# Altium PCB 10515.0502_CVSP1_2020（2拼版）2020.1019.PcbDoc (part 3 of 3)
Units mm, origin at the board's own origin, x right, y up, seen from the top; angles counter-clockwise.
Board outline 162.18 x 163.99 mm, 2 copper layers (Top Layer, Bottom Layer); 124 components, 0 nets, 386 pads, 70 vias.
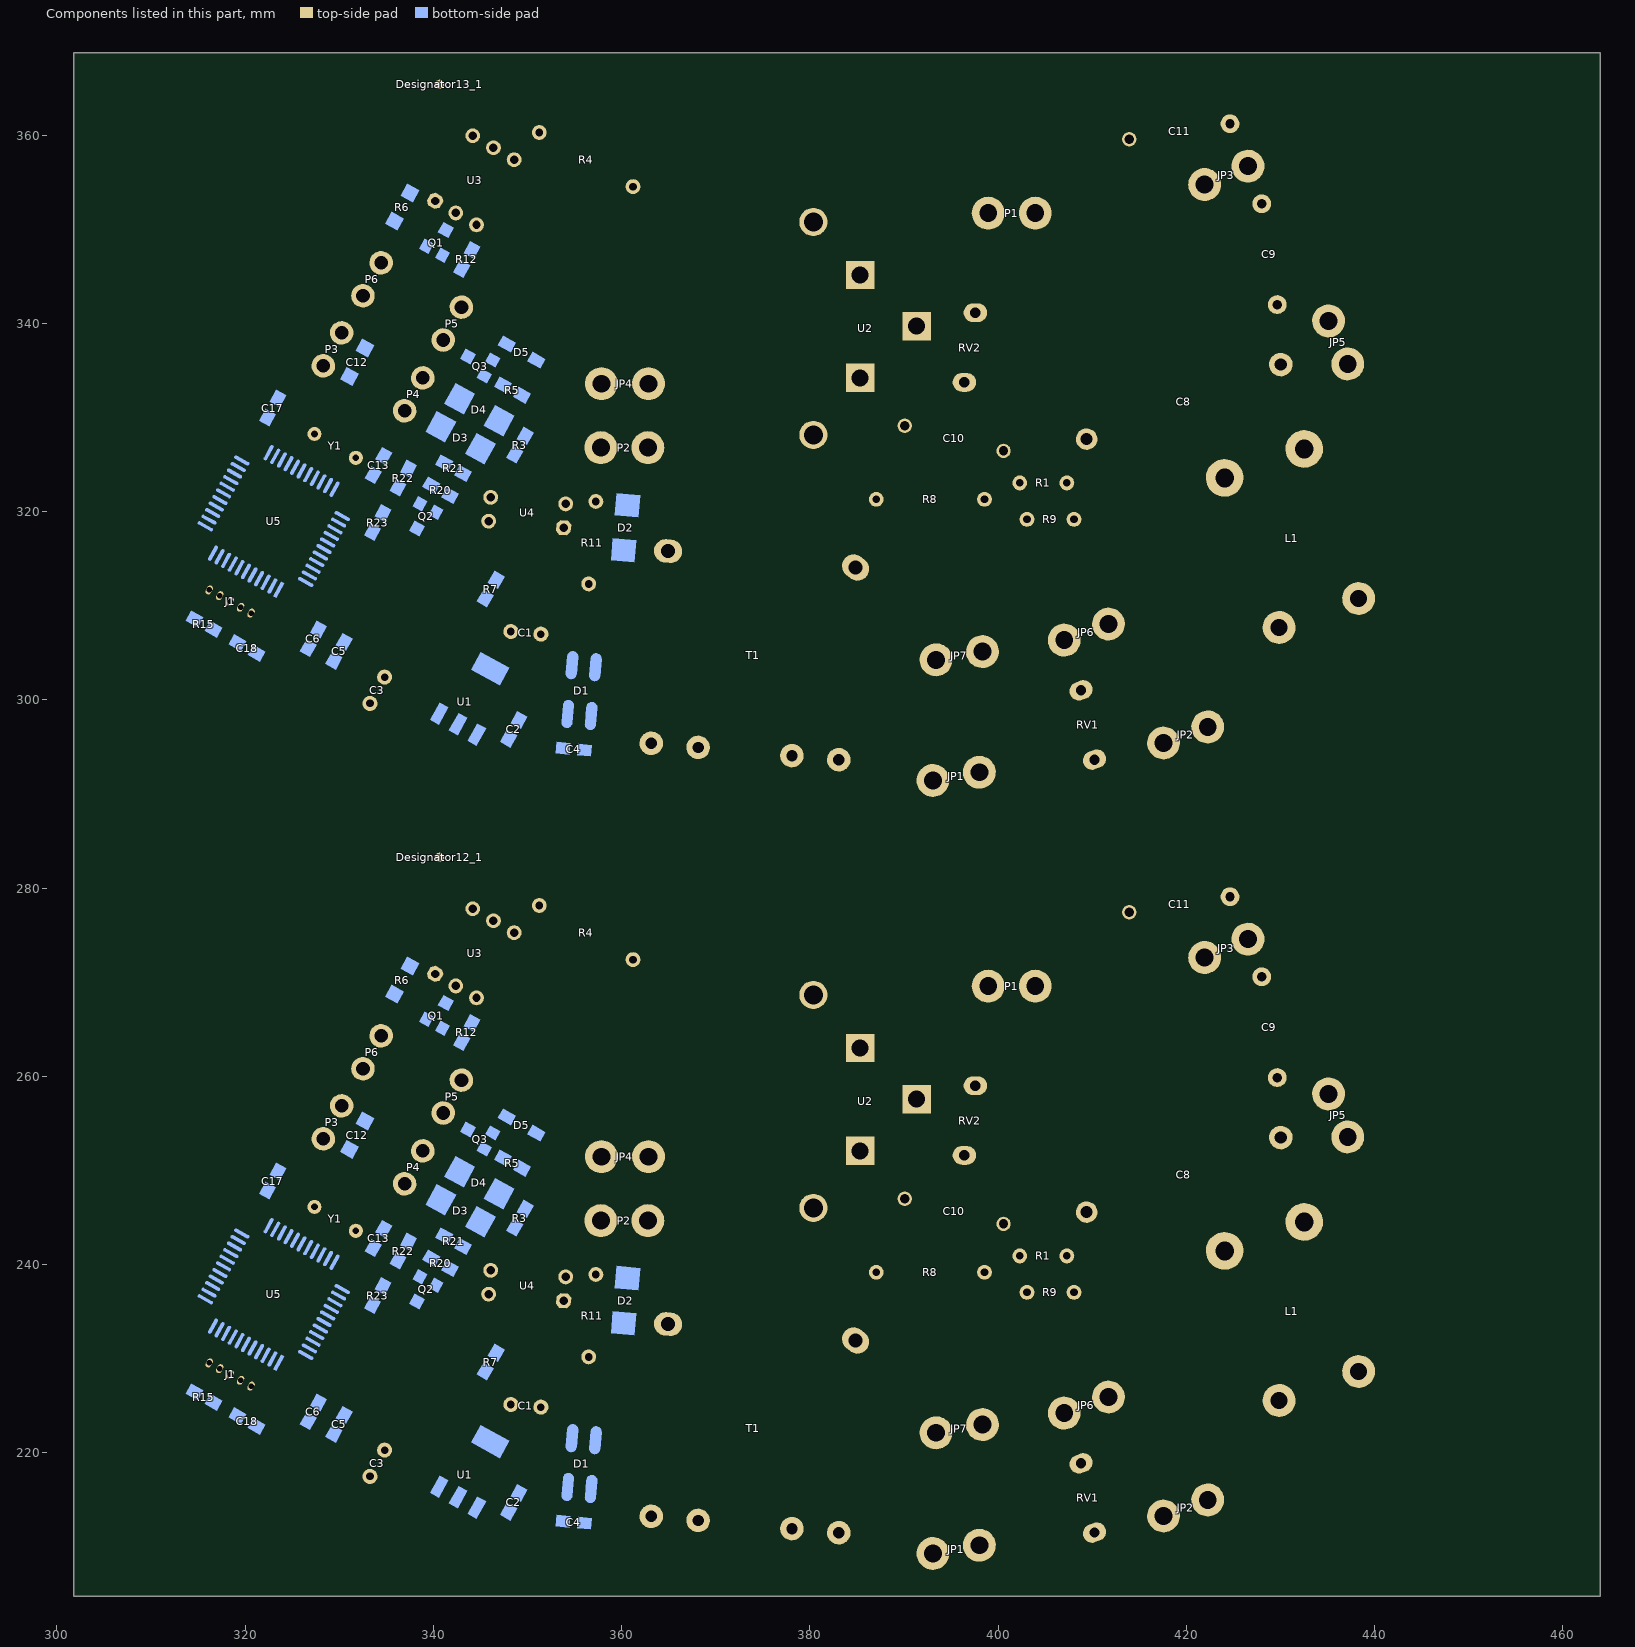
[diagram p3: the components of this part, seen from the top]

## Via types
v1: diameter 0.7, hole 0.4, Top Layer to Bottom Layer, tented both sides, 46 vias
v2: diameter 0.8, hole 0.4, Top Layer to Bottom Layer, tented both sides, 24 vias

## Nets (pads, with @x,y where several pads share a name; then routed paths per layer and width w, separated by ;. In a path a pad name is that pad's centre, name@x,y a point inside that pad or via, vN(x,y) a via of type N, cw(c..) or ccw(c..) an arc to the next point about the centre after c; other vN are vias at no path point) (continued)
copper on no net: (continued)
  Bottom Layer w0.6: 330.988,256.439 330.997,256.442 ; 330.988,338.569 330.997,338.572 ; 340.069,215.43 ccw(c339.54,215.723) 340.121,215.89 ; 340.069,297.56 ccw(c339.54,297.853) 340.121,298.02 ; 340.07,215.432 cw(c340.597,215.14) 340.431,215.719 ; 340.07,297.562 cw(c340.597,297.27) 340.431,297.849 ; 340.616,216.418 339.242,213.934 339.941,212.731 347.989,210.108 348.894,210.06 349.275,210.632 350.863,213.616 350.545,214.632 349.113,215.743 350.99,219.395 351.434,224.856 354.419,224.538 354.863,224.094 354.837,223.595 ; 340.616,298.548 339.242,296.064 339.941,294.861 347.989,292.238 348.894,292.191 349.275,292.762 350.863,295.747 350.545,296.763 349.113,297.873 350.99,301.525 351.434,306.986 354.419,306.669 354.863,306.224 354.837,305.725 ; 349.072,216.173 ccw(c348.829,216.93) 349.536,216.567 ; 349.072,298.303 ccw(c348.829,299.06) 349.536,298.697 ; 349.094,215.299 cw(c349.249,214.072) 350.007,215.05 ; 349.094,297.429 cw(c349.249,296.202) 350.007,297.18 ; 349.494,215.956 cw(c350.277,216.208) 349.545,216.584 ; 349.494,298.086 cw(c350.277,298.338) 349.545,298.714 ; 351.053,224.532 cw(c350.133,223.751) 351.336,223.653 cw(c352.539,223.555) 351.758,224.475 ; 351.053,306.662 cw(c350.133,305.881) 351.336,305.783 cw(c352.539,305.685) 351.758,306.605 ; 351.748,224.467 cw(c352.507,223.528) 352.634,224.728 cw(c352.762,225.929) 351.823,225.17 ; 351.748,306.597 cw(c352.507,305.658) 352.634,306.858 cw(c352.762,308.059) 351.823,307.3 ; 353.454,235.871 cw(c352.505,235.175) 353.668,234.996 cw(c354.831,234.817) 354.135,235.766 ; 353.454,318.001 cw(c352.505,317.305) 353.668,317.126 cw(c354.831,316.947) 354.135,317.896 ; 353.53,212.509 cw(c352.917,211.981) 353.723,211.921 cw(c354.53,211.861) 354.002,212.474 ; 353.53,294.639 cw(c352.917,294.111) 353.723,294.051 cw(c354.53,293.991) 354.002,294.604 ; 353.847,236.159 353.593,234.508 354.165,234.127 354.99,234.063 357.874,233.79 360.223,233.79 360.223,231.296 359.114,230.186 356.509,230.186 ; 353.847,318.289 353.593,316.638 354.165,316.257 354.99,316.194 357.874,315.92 360.223,315.92 360.223,313.426 359.114,312.316 356.509,312.316 ; 353.934,213.838 ccw(c355.165,213.672) 354.177,212.919 ; 353.934,295.968 ccw(c355.165,295.802) 354.177,295.049 ; 353.96,215.296 cw(c353.5,214.945) 354.073,214.868 ; 353.96,297.426 cw(c353.5,297.075) 354.073,296.998 ; 354.046,214.664 cw(c354.908,214.547) 354.381,215.239 ; 354.046,296.794 cw(c354.908,296.677) 354.381,297.369 ; 354.278,216.374 353.784,212.727 353.593,210.187 353.593,209.489 354.419,208.854 366.166,207.203 367.436,207.711 367.518,208.31 ; 354.278,298.504 353.784,294.857 353.593,292.318 353.593,291.619 354.419,290.984 366.166,289.333 367.436,289.841 367.518,290.44 ; 354.608,222.674 ccw(c354.196,223.132) 354.811,223.1 ; 354.608,304.804 ccw(c354.196,305.262) 354.811,305.23 ; 354.611,222.677 ccw(c354.179,223.169) 354.833,223.127 ; 354.611,304.807 ccw(c354.179,305.299) 354.833,305.257 ; 354.8,223.649 354.798,223.609 ; 354.8,305.78 354.798,305.739 ; 354.819,223.252 ccw(c355.651,223.209) 355.032,222.652 ; 354.819,305.382 ccw(c355.651,305.339) 355.032,304.782 ; 354.839,223.223 ccw(c355.63,223.172) 355.035,222.649 ; 354.839,305.353 ccw(c355.63,305.302) 355.035,304.779 ; 355.801,212.317 cw(c355.174,211.806) 355.979,211.724 cw(c356.783,211.642) 356.272,212.269 ; 355.801,294.447 cw(c355.174,293.936) 355.979,293.854 cw(c356.783,293.772) 356.272,294.399 ; 356.276,213.634 ccw(c357.493,213.397) 356.465,212.704 ; 356.276,295.764 ccw(c357.493,295.527) 356.465,294.834 ; 356.415,214.343 cw(c357.442,214.143) 356.857,215.011 ; 356.415,296.473 cw(c357.442,296.273) 356.857,297.141 ; 356.768,216.156 356.061,212.528 355.816,210.124 356.256,209.923 356.416,209.85 361.658,209.169 362.483,209.679 362.675,210.695 ; 356.768,298.286 356.061,294.658 355.816,292.254 356.256,292.053 356.416,291.98 361.658,291.299 362.483,291.81 362.675,292.825 ; 356.854,229.842 cw(c357.686,229.01) 357.686,230.186 cw(c357.686,231.363) 356.854,230.531 ; 356.854,311.972 cw(c357.686,311.14) 357.686,312.316 cw(c357.686,313.493) 356.854,312.661 ; 357.966,233.79 ccw(c357.966,235.984) 359.517,234.433 ; 357.966,315.92 ccw(c357.966,318.114) 359.517,316.563 ; 357.995,233.79 cw(c357.995,231.638) 359.517,233.16 ; 357.995,315.92 cw(c357.995,313.768) 359.517,315.29 ; 359.657,233.148 cw(c358.288,231.78) 360.223,231.78 ; 359.657,315.278 cw(c358.288,313.91) 360.223,313.91 ; 360.223,231.443 cw(c362.634,231.443) 360.929,233.148 ; 360.223,313.573 cw(c362.634,313.573) 360.929,315.278 ; 362.373,212.719 cw(c360.479,211.426) 362.732,211.001 cw(c364.986,210.575) 363.693,212.47 ; 362.373,294.849 cw(c360.479,293.556) 362.732,293.131 cw(c364.986,292.705) 363.693,294.6 ; 362.386,212.701 cw(c360.523,211.364) 362.786,210.991 cw(c365.049,210.619) 363.712,212.483 ; 362.386,294.831 cw(c360.523,293.494) 362.786,293.121 cw(c365.049,292.749) 363.712,294.613 ; v1(366.353,238.196) 367.31,239.153 387.063,239.153 ; v1(366.353,320.326) 367.31,321.283 387.063,321.283 ; 367.382,212.245 cw(c365.554,210.859) 367.826,210.547 cw(c370.098,210.234) 368.713,212.062 ; 367.382,294.375 cw(c365.554,292.989) 367.826,292.677 cw(c370.098,292.364) 368.713,294.192 ; 367.436,208.155 367.518,208.31 ; 367.436,290.286 367.518,290.44 ; 368.139,212.819 367.518,208.31 ; 368.139,294.949 367.518,290.44 ; 386.201,239.153 ccw(c386.201,240.415) 387.093,239.523 ; 386.201,321.283 ccw(c386.201,322.545) 387.093,321.653 ; 386.322,239.153 cw(c386.322,238.062) 387.093,238.833 ; 386.322,321.283 cw(c386.322,320.192) 387.093,320.963 ; 354.731,221.555 354.863,223.586 354.837,223.595 ; 354.731,221.555 354.798,223.609 ; 354.731,221.555 354.837,223.595 ; 354.731,303.685 354.863,305.716 354.837,305.725 ; 354.731,303.685 354.798,305.739 ; 354.731,303.685 354.837,305.725 ; 354.798,223.609 354.837,223.595 ; 354.798,305.739 354.837,305.725 ; 362.675,210.695 363.158,213.254 362.737,210.695 362.675,210.695 ; 362.675,292.825 363.158,295.384 362.737,292.826 362.675,292.825
  Bottom Layer w0.8: 330.259,256.86 332.463,254.728 338.888,252.078 ; 330.259,338.99 332.463,336.858 338.888,334.208 ; 330.273,256.01 cw(c330.307,253.958) 331.734,255.433 cw(c333.161,256.908) 331.109,256.874 ; 330.273,338.14 cw(c330.307,336.088) 331.734,337.563 cw(c333.161,339.038) 331.109,339.004 ; 331.293,252.383 cw(c331.293,251.398) 331.989,252.094 ; 331.293,334.513 cw(c331.293,333.528) 331.989,334.224 ; 331.355,252.729 335.129,248.955 336.249,248.955 ; 331.355,334.859 335.129,331.085 336.249,331.085 ; 331.819,255.351 ccw(c332.504,256.06) 332.521,255.074 ; 331.819,337.481 ccw(c332.504,338.19) 332.521,337.204 ; 332.524,260.805 341.255,255.939 ; 332.524,342.935 341.255,338.069 ; 332.742,254.929 ccw(c333.663,255.313) 333.283,254.39 ; 332.742,337.059 ccw(c333.663,337.443) 333.283,336.52 ; 333.647,254.24 v1(334.438,255.803) ; 333.647,336.37 v1(334.438,337.933) ; 334.463,264.303 339.063,266.268 ; 334.463,346.433 339.063,348.398 ; 334.78,265.092 ccw(c335.544,266.996) 336.35,265.109 ccw(c337.156,263.222) 335.252,263.986 ; 334.78,347.222 ccw(c335.544,349.126) 336.35,347.239 ccw(c337.156,345.352) 335.252,346.116 ; 334.928,237.896 ccw(c335.865,238.245) 335.449,237.336 ; 334.928,320.026 ccw(c335.865,320.375) 335.449,319.466 ; 336.255,240.429 334.646,237.702 338.251,236.057 ; 336.255,322.559 334.646,319.832 338.251,318.187 ; 336.949,248.58 340.815,246.88 342.79,249.855 ; 336.949,330.71 340.815,329.01 342.79,331.985 ; 337.363,242.428 v1(338.163,243.703) ; 337.363,324.558 v1(338.163,325.833) ; 337.526,271.727 338.375,270.878 340.188,270.878 ; 337.526,353.857 338.375,353.008 340.188,353.008 ; 338.018,265.821 cw(c338.618,264.415) 339.188,265.834 ; 338.018,347.951 cw(c338.618,346.545) 339.188,347.964 ; 338.103,251.752 ccw(c336.208,250.963) 336.991,252.86 ccw(c337.773,254.758) 338.562,252.863 ; 338.103,333.882 ccw(c336.208,333.093) 336.991,334.99 ccw(c337.773,336.888) 338.562,334.993 ; 338.588,238.728 339.788,240.678 341.164,243.036 ; 338.588,320.858 339.788,322.808 341.164,325.166 ; 339.327,239.929 ccw(c338.475,240.453) 339.448,240.685 ; 339.327,322.059 ccw(c338.475,322.583) 339.448,322.815 ; 339.914,270.604 ccw(c339.253,269.943) 339.253,270.878 ccw(c339.253,271.813) 339.914,271.152 ; 339.914,352.734 ccw(c339.253,352.073) 339.253,353.008 ccw(c339.253,353.943) 339.914,353.282 ; v1(340.313,235.628) 340.294,235.647 340.294,237.783 341.787,239.57 ; v1(340.313,317.758) 340.294,317.777 340.294,319.913 341.787,321.7 ; 340.69,247.725 ccw(c340.304,249.637) 341.929,248.559 ; 340.69,329.855 ccw(c340.304,331.767) 341.929,330.689 ; 340.988,265.103 344.121,265.677 ; 340.988,347.233 344.121,347.807 ; 341.215,238.885 ccw(c340.453,239.522) 341.442,239.61 ; 341.215,321.015 ccw(c340.453,321.652) 341.442,321.74 ; 341.325,267.774 342.388,269.608 ; 341.325,349.904 342.388,351.738 ; 341.633,247.1 cw(c343.507,247.478) 341.914,248.536 ; 341.633,329.23 cw(c343.507,329.608) 341.914,330.666 ; 341.676,248.177 cw(c343.301,247.098) 342.914,249.01 ; 341.676,330.307 cw(c343.301,329.228) 342.914,331.14 ; 341.691,248.199 ccw(c340.097,249.257) 341.972,249.635 ; 341.691,330.329 ccw(c340.097,331.387) 341.972,331.765 ; 342.013,269.508 cw(c341.11,269.268) 341.919,268.799 cw(c342.728,268.33) 342.487,269.234 ; 342.013,351.638 cw(c341.11,351.398) 341.919,350.929 cw(c342.728,350.46) 342.487,351.364 ; 342.988,259.603 343.667,258.924 343.667,254.34 ; 342.988,341.733 343.667,341.054 343.667,336.47 ; 343.163,241.928 345.013,244.553 ; 343.163,324.058 345.013,326.683 ; 343.251,265.518 cw(c343.414,264.63) 343.926,265.373 ; 343.251,347.648 cw(c343.414,346.76) 343.926,347.503 ; 343.506,241.907 cw(c344.489,242.077) 343.673,242.652 ; 343.506,324.037 cw(c344.489,324.207) 343.673,324.782 ; 343.85,242.903 cw(c345.45,241.775) 345.116,243.704 ; 343.85,325.033 cw(c345.45,323.905) 345.116,325.834 ; 343.871,242.932 ccw(c342.313,244.03) 344.191,244.355 ; 343.871,325.062 ccw(c342.313,326.16) 344.191,326.485 ; 345.393,252.297 346.354,251.336 347.414,251.336 ; 345.393,334.427 346.354,333.466 347.414,333.466 ; 346.338,254.003 347.814,255.479 347.814,255.701 ; 346.338,336.133 347.814,337.609 347.814,337.831 ; 346.988,247.528 349.883,246.048 ; 346.988,329.658 349.883,328.178 ; 348.587,275.266 355.943,270.893 364.791,264.874 ; 348.587,357.396 355.943,353.024 364.791,347.004 ; 348.683,274.891 cw(c348.913,273.984) 349.391,274.788 cw(c349.869,275.592) 348.963,275.362 ; 348.683,357.021 cw(c348.913,356.114) 349.391,356.918 cw(c349.869,357.722) 348.963,357.492 ; 348.888,243.695 ccw(c348.655,243.695) 348.655,243.929 349.205,243.378 v1(349.913,243.378) cw(c349.913,244.39) 348.942,244.106 ; 348.888,325.825 ccw(c348.655,325.825) 348.655,326.059 349.205,325.508 v1(349.913,325.508) cw(c349.913,326.52) 348.942,326.236 ; 348.984,246.508 cw(c348.474,245.511) 349.539,245.856 ; 348.984,328.638 cw(c348.474,327.641) 349.539,327.986 ; 349.009,243.575 ccw(c349.679,244.245) v1@349.926,243.33 ; 349.009,325.705 ccw(c349.679,326.375) v1@349.926,325.46 ; 349.413,250.228 349.413,250.953 v1(350.013,251.553) ; 349.413,332.358 349.413,333.083 v1(350.013,333.683) ; 364.256,265.17 364.791,264.874 ; 364.256,347.3 364.791,347.004 ; 383.215,265.026 cw(c381.41,262.818) 384.258,262.965 ; 383.215,347.156 cw(c381.41,344.948) 384.258,345.095 ; 383.793,264.554 ccw(c385.048,266.09) 385.247,264.116 ; 383.793,346.684 ccw(c385.048,348.22) 385.247,346.246 ; 384.639,251.25 cw(c383.29,249.684) 385.357,249.684 ; 384.639,333.38 cw(c383.29,331.814) 385.357,331.814 ; 385.357,252.083 385.357,249.684 ; 385.357,263.275 383.401,264.874 364.791,264.874 ; 385.357,334.213 385.357,331.814 ; 385.357,345.405 383.401,347.004 364.791,347.004 ; 386.075,251.25 ccw(c387.424,249.684) 385.357,249.684 ; 386.075,333.38 ccw(c387.424,331.814) 385.357,331.814 ; 389.83,247.283 ccw(c389.212,246.665) 389.212,247.538 ccw(c389.212,248.412) 389.83,247.794 ; 389.83,329.413 ccw(c389.212,328.795) 389.212,329.668 ccw(c389.212,330.542) 389.83,329.924 ; 390.086,247.9 ccw(c390.086,250.368) 391.831,248.623 ; 390.086,330.03 ccw(c390.086,332.498) 391.831,330.753 ; 391.357,257.571 394.545,257.571 398.093,261.119 ; 391.357,339.701 394.545,339.701 398.093,343.249 ; 392.134,210.264 ccw(c389.83,212.569) 393.089,212.569 ccw(c396.348,212.569) 394.044,210.264 ; 392.134,292.394 ccw(c389.83,294.699) 393.089,294.699 ccw(c396.348,294.699) 394.044,292.394 ; 392.135,256.794 cw(c394.013,254.916) 394.013,257.571 cw(c394.013,260.227) 392.135,258.349 ; 392.135,338.924 cw(c394.013,337.046) 394.013,339.701 cw(c394.013,342.357) 392.135,340.479 ; 392.464,221.171 cw(c390.955,219.663) 393.089,219.663 ; 392.464,303.301 cw(c390.955,301.793) 393.089,301.793 ; 393.089,218.071 cw(c397.474,218.071) 394.373,221.171 ; 393.089,220.002 cw(c395.542,220.002) 393.807,221.737 ; 393.089,300.201 cw(c397.474,300.201) 394.373,303.301 ; 393.089,302.132 cw(c395.542,302.132) 393.807,303.867 ; 393.419,222.126 ccw(c393.419,227.35) 397.331,223.889 ; 393.419,304.256 ccw(c393.419,309.48) 397.331,306.019 ; 394.099,208.414 cw(c396.093,206.644) 396.093,209.31 ; 394.099,210.206 ccw(c396.093,211.976) 396.093,209.31 ; 394.099,290.544 cw(c396.093,288.774) 396.093,291.44 ; 394.099,292.336 ccw(c396.093,294.106) 396.093,291.44 ; 394.428,221.23 cw(c396.422,219.46) 396.422,222.126 cw(c396.422,224.792) 394.428,223.022 ; 394.428,303.36 cw(c396.422,301.59) 396.422,304.256 cw(c396.422,306.922) 394.428,305.152 ; 394.525,251.317 cw(c396.18,249.663) 396.18,252.002 ; 394.525,333.447 cw(c396.18,331.793) 396.18,334.132 ; 394.865,209.31 ccw(c394.865,212.963) 397.601,210.542 ; 394.865,291.44 ccw(c394.865,295.093) 397.601,292.672 ; 395.195,222.126 ccw(c395.195,225.779) 397.931,223.359 ; 395.195,304.256 ccw(c395.195,307.909) 397.931,305.489 ; 395.692,258.718 cw(c397.347,257.064) 397.347,259.403 ; 395.692,340.848 cw(c397.347,339.194) 397.347,341.533 ; 396.463,251.978 395.805,251.978 395.455,251.628 394.836,251.628 390.746,247.538 388.473,247.538 387.988,247.053 385.357,249.684 ; 396.463,334.108 395.805,334.108 395.455,333.758 394.836,333.758 390.746,329.668 388.473,329.668 387.988,329.183 385.357,331.814 ; 397.002,211.072 cw(c393.089,214.533) 393.089,209.31 ; 397.002,293.202 cw(c393.089,296.663) 393.089,291.44 ; 397.422,260.428 ccw(c395.803,262.047) 398.093,262.047 ; 397.422,342.558 ccw(c395.803,344.177) 398.093,344.177 ; 397.685,260.581 ccw(c397.535,261.119) 398.093,261.119 ; 397.685,342.711 ccw(c397.535,343.249) 398.093,343.249 ; 398.013,210.178 397.889,210.054 cw(c396.093,211.85) 396.093,209.31 ; 398.013,292.308 397.889,292.184 cw(c396.093,293.98) 396.093,291.44 ; 398.093,264.24 cw(c404.303,264.24) 399.912,268.631 ; 398.093,266.171 cw(c402.372,266.171) 399.346,269.196 ; 398.093,346.37 cw(c404.303,346.37) 399.912,350.761 ; 398.093,348.301 cw(c402.372,348.301) 399.346,351.326 ; 398.343,222.994 398.218,222.87 cw(c396.422,224.666) 396.422,222.126 395.313,222.126 393.419,222.126 ccw(c394.214,221.33) 393.089,221.33 393.089,209.31 ; 398.343,305.124 398.218,305 cw(c396.422,306.796) 396.422,304.256 395.313,304.256 393.419,304.256 ccw(c394.214,303.46) 393.089,303.46 393.089,291.44 ; 398.957,269.585 398.093,268.721 398.093,261.119 ; 398.957,351.715 398.093,350.851 398.093,343.249 ; 393.089,209.31 396.093,209.31 ; 393.089,291.44 396.093,291.44
  Bottom Layer w1: 326.79,226.624 327.82,225.738 ; 326.79,308.754 327.82,307.868 ; 327.433,226.071 cw(c326.855,225.399) 327.739,225.465 ; 327.433,308.201 cw(c326.855,307.529) 327.739,307.595 ; 327.812,225.364 v2(329.177,224.697) 330.543,224.03 334.207,221.726 334.82,220.288 ; 327.812,307.494 v2(329.177,306.827) 330.543,306.161 334.207,303.856 334.82,302.418 ; 328.001,225.519 ccw(c328.719,225.766) 328.386,225.084 ; 328.001,307.649 ccw(c328.719,307.896) 328.386,307.214 ; 329.969,224.311 cw(c329.636,223.629) 330.353,223.876 ; 329.969,306.441 cw(c329.636,305.759) 330.353,306.006 ; 330.511,223.788 cw(c330.679,223.048) 331.083,223.69 ; 330.511,305.918 cw(c330.679,305.178) 331.083,305.82 ; 344.168,277.817 344.703,278.767 346.164,279.275 350.712,278.366 ; 344.168,359.947 344.703,360.898 346.164,361.406 350.712,360.496 ; 344.447,277.681 cw(c347.342,276.28) 346.285,279.318 ; 344.447,359.811 cw(c347.342,358.41) 346.285,361.448 ; 350.364,278.435 cw(c350.161,277.418) 351.024,277.994 ; 350.364,360.565 cw(c350.161,359.548) 351.024,360.124 ; 354.068,238.689 357.228,238.409 358.269,238.317 360.6,238.11 ; 354.068,320.819 357.228,320.539 358.269,320.447 360.6,320.24 ; 355.223,238.587 ccw(c355.449,241.135) 357.092,239.173 ; 355.223,320.717 ccw(c355.449,323.265) 357.092,321.303 ; 357.276,238.953 359.757,238.953 360.6,238.11 ; 357.276,321.083 359.757,321.083 360.6,320.24 ; 357.496,239.137 ccw(c359.458,240.78) 359.232,238.231 ; 357.496,321.267 ccw(c359.458,322.91) 359.232,320.361 ; 357.977,238.953 cw(c357.977,235.983) 360.077,238.083 ; 357.977,321.083 cw(c357.977,318.113) 360.077,320.213 ; 361.255,272.435 363.256,272.435 364.288,271.403 372.828,271.403 400.699,271.403 ; 361.255,354.565 363.256,354.565 364.288,353.533 372.828,353.533 400.699,353.533 ; 361.368,238.809 ccw(c362.624,239.275) 362.505,237.941 ; 361.368,320.939 ccw(c362.624,321.405) 362.505,320.071 ; 363.743,235.811 cw(c361.551,234.578) 363.973,233.9 ; 363.743,317.941 cw(c361.551,316.708) 363.973,316.03 ; 364.232,234.943 ccw(c365.196,235.486) 364.898,234.421 ; 364.232,317.073 ccw(c365.196,317.616) 364.898,316.551 ; 364.446,233.675 364.446,233.746 ; 364.446,315.805 364.446,315.876 ; 391.55,271.403 cw(c391.55,262.178) 398.074,268.702 ; 391.55,353.533 cw(c391.55,344.308) 398.074,350.832 ; 393.965,271.403 cw(c393.965,264.593) 398.781,269.409 ; 393.965,353.533 cw(c393.965,346.723) 398.781,351.539 ; 396.379,271.403 cw(c396.379,267.007) 399.488,270.116 ; 396.379,353.533 cw(c396.379,349.137) 399.488,352.246 ; 398.411,238.934 cw(c397.967,238.223) 398.805,238.223 ; 398.411,321.064 cw(c397.967,320.353) 398.805,320.353 ; 398.793,271.403 cw(c398.793,269.421) 400.195,270.823 ; 398.793,353.533 cw(c398.793,351.551) 400.195,352.953 ; 398.805,239.143 398.805,238.254 400.012,237.048 403.076,237.048 ; 398.805,321.274 398.805,320.385 400.012,319.178 403.076,319.178 ; 398.85,239.178 ccw(c401.19,239.178) 399.536,237.524 ; 398.85,321.308 ccw(c401.19,321.308) 399.536,319.654 ; 400.586,244.871 402.314,243.144 402.314,240.921 ; 400.586,327.001 402.314,325.274 402.314,323.051 ; 407.314,239.581 ccw(c410.609,239.581) 408.279,237.251 ; 407.314,321.711 ccw(c410.609,321.711) 408.279,319.381 ; 408.076,237.048 407.314,237.81 407.314,240.921 407.314,243.474 409.415,245.575 ; 408.076,319.178 407.314,319.94 407.314,323.052 407.314,325.604 409.415,327.705 ; 408.772,245.575 cw(c407.22,245.575) 408.317,244.477 cw(c409.415,243.379) 409.415,244.932 ; 408.772,327.705 cw(c407.22,327.705) 408.317,326.607 cw(c409.415,325.509) 409.415,327.062 ; 417.57,213.268 417.58,213.287 ; 417.57,295.398 417.58,295.417 ; 437.296,229.359 ccw(c433.399,232.088) 438.084,232.914 ; 437.296,311.489 ccw(c433.399,314.218) 438.084,315.044 ; 438.115,228.786 ccw(c436.196,230.13) 438.503,230.536 ; 438.115,310.916 ccw(c436.196,312.26) 438.503,312.666 ; 438.511,230.491 ccw(c439.77,230.713) 439.037,229.666 ; 438.511,312.621 ccw(c439.77,312.843) 439.037,311.796 ; 438.804,228.833 437.821,234.404 436.597,235.261 435.265,236.194 434.716,236.579 408.669,231.986 402.586,230.913 397.81,230.071 395.445,229.654 386.55,227.523 365.341,229.555 cw(c367.203,231.814) 364.945,233.676 362.547,237.937 360.6,238.11 ; 438.804,310.963 437.821,316.534 436.597,317.391 435.265,318.324 434.716,318.709 408.669,314.116 402.586,313.043 397.81,312.201 395.445,311.784 386.55,309.653 365.341,311.685 cw(c367.203,313.944) 364.945,315.806 362.547,320.067 360.6,320.24 ; 357.562,238.979 ccw(c358.285,239.044) 358.221,238.321 cw(c358.285,239.044) 357.562,238.979 ; 357.562,321.109 ccw(c358.285,321.174) 358.221,320.451 cw(c358.285,321.174) 357.562,321.109
  Bottom Layer w2: 393.263,222.278 396.699,222.762 ; 393.263,304.408 396.699,304.892 ; 393.419,222.126 393.089,209.31 397.889,210.054 ; 393.419,304.256 393.089,291.44 397.889,292.184 ; 394.538,210.153 395.313,222.126 ; 394.538,292.283 395.313,304.256 ; 396.238,210.653 396.699,222.762 ; 396.238,292.783 396.699,304.892 ; 398.013,210.178 398.343,222.994 396.699,222.762 ; 398.013,292.308 398.343,305.124 396.699,304.892 ; 420.75,272.28 cw(c423.796,273.148) 421.095,274.804 ; 420.75,354.41 cw(c423.796,355.278) 421.095,356.934 ; 421.025,276.587 cw(c425.853,273.46) 424.65,279.085 ; 421.025,358.717 cw(c425.853,355.59) 424.65,361.215 ; 421.089,271.719 ccw(c424.161,274.938) 424.265,270.489 ; 421.089,353.849 ccw(c424.161,357.068) 424.265,352.619 ; 421.641,273.305 ccw(c420.515,275.775) 423.057,274.825 ; 421.641,355.435 ccw(c420.515,357.905) 423.057,356.955 ; 421.745,273.344 ccw(c421.055,275.751) 423.245,274.537 ; 421.745,355.474 ccw(c421.055,357.881) 423.245,356.667 ; 421.788,273.862 cw(c422.227,270.542) 424.733,272.763 ; 421.788,355.992 cw(c422.227,352.672) 424.733,354.893 ; 422.249,271.934 cw(c423.636,268.712) 426.261,271.039 ; 422.249,354.064 cw(c423.636,350.842) 426.261,353.169 ; 422.281,271.949 cw(c423.662,269.127) 424.681,272.098 ; 422.281,354.079 cw(c423.662,351.257) 424.681,354.228 ; 422.464,272.465 422.384,272.747 422.339,272.902 ; 422.464,354.595 422.384,354.877 422.339,355.032 ; 422.673,272.828 cw(c429.746,274.844) 423.476,278.687 ; 422.673,354.958 cw(c429.746,356.974) 423.476,360.817 ; 422.973,277.867 cw(c425.281,276.453) 424.65,279.085 ; 422.973,359.997 cw(c425.281,358.583) 424.65,361.215 ; 424.26,281.411 cw(c421.647,279.777) 424.65,279.085 ; 424.26,363.541 cw(c421.647,361.907) 424.65,361.215 ; 424.611,280.584 cw(c422.821,279.788) 424.65,279.085 ; 424.611,362.714 cw(c422.821,361.918) 424.65,361.215 ; 424.847,277.427 ccw(c423.599,278.119) 424.65,279.085 ; 424.847,359.557 ccw(c423.599,360.249) 424.65,361.215 ; 425.736,278.052 ccw(c423.946,277.257) 424.65,279.085 ; 425.736,360.182 ccw(c423.946,359.387) 424.65,361.215 ; 425.775,277.966 cw(c422.049,276.31) 425.854,274.846 ; 425.775,360.096 cw(c422.049,358.44) 425.854,356.976 ; 425.851,276.35 426.031,276.402 426.42,276.514 ; 425.851,358.48 426.031,358.532 426.42,358.644 ; 425.899,274.94 ccw(c422.974,276.561) 426.188,277.483 ; 425.899,357.07 ccw(c422.974,358.691) 426.188,359.613 ; 425.905,274.951 ccw(c423.233,276.491) 426.211,277.291 ; 425.905,357.081 ccw(c423.233,358.621) 426.211,359.421 ; 426.18,273.927 cw(c424.64,271.255) 427.618,272.055 ; 426.18,356.057 cw(c424.64,353.385) 427.618,354.185 ; 426.31,276.923 ccw(c422.871,276) 424.65,279.085 ; 426.31,359.053 ccw(c422.871,358.13) 424.65,361.215 ; 426.337,276.963 ccw(c422.932,275.987) 424.65,279.085 ; 426.337,359.093 ccw(c422.932,358.117) 424.65,361.215 ; 426.463,276.526 426.42,276.514 ; 426.463,358.656 426.42,358.644 ; 427.018,271.893 cw(c428.383,272.927) 427.111,274.074 ; 427.018,354.023 cw(c428.383,355.057) 427.111,356.204 ; 427.067,274.419 426.986,274.7 425.742,279.041 ; 427.067,356.549 426.986,356.83 425.742,361.171 ; 420.973,270.351 421.602,268.925 428.015,270.576 ; 420.973,270.351 420.25,271.729 419.189,273.751 423.235,280.001 424.205,281.498 ; 420.973,270.351 420.294,271.892 419.951,272.671 420.355,273.451 420.84,274.386 423.973,279.499 424.435,280.252 ; 420.973,352.481 421.602,351.055 428.015,352.706 ; 420.973,352.481 420.25,353.859 419.189,355.881 423.235,362.131 424.205,363.628 ; 420.973,352.481 420.294,354.022 419.951,354.802 420.355,355.581 420.84,356.516 423.973,361.629 424.435,362.382 ; 422.339,272.902 424.65,279.085 ; 422.339,272.902 425.602,271.782 424.634,272.875 423.579,274.065 423.213,274.478 ; 422.339,272.902 423.213,274.478 ; 422.339,272.902 422.36,272.659 422.554,270.449 428.015,270.576 ; 422.339,355.032 424.65,361.215 ; 422.339,355.032 425.602,353.913 424.634,355.005 423.579,356.195 423.213,356.608 ; 422.339,355.032 423.213,356.608 ; 422.339,355.032 422.36,354.789 422.554,352.579 428.015,352.706 ; 423.213,274.478 423.993,275.886 ; 423.213,356.608 423.993,358.016 ; 423.993,275.886 425.495,278.596 ; 423.993,275.886 425.557,273.821 428.015,270.576 ; 423.993,358.016 425.495,360.726 ; 423.993,358.016 425.557,355.951 428.015,352.706 ; 424.205,281.498 424.435,280.252 ; 424.205,281.498 424.957,279.806 ; 424.205,281.498 425.415,279.563 425.742,279.041 ; 424.205,363.628 424.435,362.382 ; 424.205,363.628 424.957,361.936 ; 424.205,363.628 425.415,361.693 425.742,361.171 ; 424.435,280.252 424.65,279.085 ; 424.435,280.252 424.459,280.291 424.957,279.806 ; 424.435,362.382 424.65,361.215 ; 424.435,362.382 424.459,362.422 424.957,361.936 ; 424.957,279.806 425.174,279.318 425.495,278.596 ; 424.957,279.806 425.16,279.608 425.742,279.041 ; 424.957,361.936 425.174,361.448 425.495,360.726 ; 424.957,361.936 425.16,361.738 425.742,361.171 ; 425.495,278.596 426.42,276.514 ; 425.495,278.596 425.504,278.612 425.742,279.041 ; 425.495,360.726 426.42,358.644 ; 425.495,360.726 425.504,360.742 425.742,361.171 ; 425.742,279.041 426.42,276.514 ; 425.742,361.171 426.42,358.644 ; 426.42,276.514 426.915,274.673 428.015,270.576 ; 426.42,358.644 426.915,356.803 428.015,352.706 ; 421.458,273.771 cw(c422.484,271.387) 424.427,273.108 ccw(c422.484,271.387) 421.458,273.771 ; 421.458,355.901 cw(c422.484,353.517) 424.427,355.238 ccw(c422.484,353.517) 421.458,355.901
  Bottom Layer w4: 406.89,224.017 ccw(c410.331,228.643) 411.169,222.939 ; 406.89,306.147 ccw(c410.331,310.773) 411.169,305.069 ; 408.065,222.483 430.346,225.755 ; 408.065,304.613 430.346,307.885 ; 408.482,222.544 ccw(c407.874,226.688) 411.983,225.88 ; 408.482,304.674 ccw(c407.874,308.818) 411.983,308.01 ; 408.983,225.114 420.156,227.084 ; 408.983,307.244 420.156,309.214 ; 411.589,225.727 ccw(c417.087,233.118) 418.425,224.004 ; 411.589,307.857 ccw(c417.087,315.248) 418.425,306.134 ; 420.156,227.084 406.494,224.675 408.7,219.74 430.346,225.755 ; 420.156,227.084 426.78,228.252 430.346,225.755 ; 420.156,309.214 406.494,306.805 408.7,301.87 430.346,307.885 ; 420.156,309.214 426.78,310.382 430.346,307.885
  Bottom Layer w5: 429.663,259.869 430.047,253.495 433.022,244.719 ; 429.663,341.999 430.047,335.625 433.022,326.849 ; 433.921,255.971 435.383,252.754 435.508,252.478 433.022,244.719 ; 433.921,338.101 435.383,334.884 435.508,334.609 433.022,326.849 ; 434.288,255.163 ccw(c438.167,256.926) 436.946,252.844 ; 434.288,337.293 ccw(c438.167,339.056) 436.946,334.974 ; 435.449,247.056 ccw(c429.814,252.91) 437.908,253.629 ; 435.449,329.186 ccw(c429.814,335.04) 437.908,335.759 ; 437.161,248.704 ccw(c434.255,251.722) 437.794,253.964 ; 437.161,330.834 ccw(c434.255,333.852) 437.794,336.094 ; 433.022,244.719 441.558,246.001 439.758,251.204 ; 433.022,244.719 439.588,251.041 439.758,251.204 ; 433.022,244.719 429.262,253.144 426.825,258.602 426.555,259.209 428.495,261.08 430.047,262.575 431.194,261.494 434.764,258.13 434.888,257.958 437.751,253.988 439.758,251.204 ; 433.022,326.849 441.558,328.132 439.758,333.334 ; 433.022,326.849 439.588,333.171 439.758,333.334 ; 433.022,326.849 429.262,335.274 426.825,340.732 426.555,341.34 428.495,343.21 430.047,344.705 431.194,343.624 434.764,340.26 434.888,340.088 437.751,336.118 439.758,333.334 ; 437.488,254.237 cw(c435.768,250.696) 439.488,251.983 ccw(c435.768,250.696) 437.488,254.237 ; 437.488,336.367 cw(c435.768,332.826) 439.488,334.113 ccw(c435.768,332.826) 437.488,336.367
  Bottom Layer w6: 409.606,211.252 436.792,219.511 439.307,221.975 438.804,228.833 438.804,233.049 436.538,235.315 cw(c437.385,234.467) 437.385,235.666 446.215,235.666 ; 409.606,293.382 436.792,301.641 439.307,304.105 438.804,310.963 438.804,315.179 436.538,317.445 cw(c437.385,316.597) 437.385,317.796 446.215,317.796 ; 436.996,234.857 cw(c430.781,228.642) 439.57,228.642 ; 436.996,316.987 cw(c430.781,310.772) 439.57,310.772
  other v1: 311.013,226.403 310.288,227.978 329.737,228.428 313.763,229.128 325.288,229.24 332.463,230.764 313.538,231.828 324.657,231.928 314.613,233.328 322.625,233.978 325.813,235.336 325.338,237.368 311.013,308.533 310.288,310.108 329.737,310.558 313.763,311.258 325.288,311.37 332.463,312.894 313.538,313.958 324.657,314.058 314.613,315.458 322.625,316.108 325.813,317.466 325.338,319.498

## Polygon pours and split planes (outlines as drawn)
no net on Bottom Solder "TopLayer-No Net" (solid): 426.72,239.766 416.687,238.039 414.832,245.049 425.958,243.576 426.72,239.766
no net on Bottom Solder "TopLayer" (hatched 90Degree grid 0 track 0.025, remove dead copper): 390.741,272.481 402.488,274.576 414.49,279.847 415.696,277.815 407.441,269.75 405.981,262.702 408.267,257.622 413.347,255.717 414.68,255.717 425.158,245.112 426.11,243.461 413.537,244.096 406.87,244.287 401.917,253.24 395.821,255.272 390.677,255.78 390.487,272.417 390.741,272.481
no net on Bottom Solder "TopLayer" (hatched 90Degree grid 0 track 0.025, remove dead copper): 429.984,264.734 424.269,259.527 429.031,248.478 432.27,242.699 442.874,244.223 443.827,246.001 441.477,252.097 436.27,259.59 429.984,264.734
no net on Bottom Solder "TopLayer" (hatched 90Degree grid 0 track 0.025, remove dead copper): 356.324,254.701 362.166,257.939 377.342,258.574 383.438,254.51 387.121,254.447 388.645,252.542 398.488,251.97 398.932,248.732 397.218,246.509 388.709,246.382 385.28,250.446 370.357,250.891 367.944,244.668 364.706,242.763 355.943,242.572 356.006,254.574 356.197,254.637
no net on Bottom Solder "TopLayer-No Net" (solid): 426.72,321.896 416.687,320.169 414.832,327.179 425.958,325.706 426.72,321.896
no net on Bottom Solder "TopLayer" (hatched 90Degree grid 0 track 0.025, remove dead copper): 390.741,354.611 402.488,356.707 414.49,361.977 415.696,359.945 407.441,351.881 405.981,344.832 408.267,339.752 413.347,337.847 414.68,337.847 425.158,327.243 426.11,325.592 413.537,326.227 406.87,326.417 401.917,335.371 395.821,337.403 390.677,337.911 390.487,354.548 390.741,354.611
no net on Bottom Solder "TopLayer" (hatched 90Degree grid 0 track 0.025, remove dead copper): 429.984,346.864 424.269,341.657 429.031,330.608 432.27,324.83 442.874,326.354 443.827,328.132 441.477,334.228 436.27,341.721 429.984,346.864
no net on Bottom Solder "TopLayer" (hatched 90Degree grid 0 track 0.025, remove dead copper): 356.324,336.831 362.166,340.07 377.342,340.705 383.438,336.641 387.121,336.577 388.645,334.672 398.488,334.101 398.932,330.862 397.218,328.64 388.709,328.513 385.28,332.577 370.357,333.021 367.944,326.798 364.706,324.893 355.943,324.703 356.006,336.704 356.197,336.768
no net on Top Layer "Top Layer-No Net" (hatched 90Degree grid 0.508 track 0.508, remove dead copper, pour order 1000): 331.408,271.549 307.427,226.989 330.097,215.273 332.172,214.523 334.447,213.673 343.747,210.698 349.494,220.96 349.497,234.873 350.689,255.614 350.697,257.298 344.823,264.348 331.394,271.523
no net on Top Layer "TopLayer-No Net" (solid, pour order 20): 431.128,214.787 439.103,217.098 450.33,222.991 451.549,232.211 448.832,237.088 436.055,230.941 435.674,222.839 431.128,214.787
no net on Top Layer "TopLayer" (solid, remove dead copper, pour order 23): 414.68,280.355 390.296,272.989 390.487,255.653 391.947,255.209 395.567,255.209 401.79,253.177 406.87,243.969 414.68,243.588 416.204,237.365 427.253,239.334 427.317,239.397 425.92,245.049 414.871,256.098 413.093,256.161 409.473,257.177 406.679,261.432 406.362,263.337 408.14,269.433 416.204,277.497 414.68,280.291
no net on Top Layer "TopLayer" (solid, remove dead copper, pour order 27): 355.816,254.066 355.879,242.191 365.023,242.318 367.817,244.096 370.23,249.557 370.675,250.637 384.962,250.256 388.074,246.065 397.408,246.065 398.615,247.525 399.313,248.478 399.313,252.288 388.899,252.732 387.439,254.637 355.816,255.209 355.816,253.685
no net on Top Layer "TopLayer" (solid, remove dead copper, pour order 28): 355.943,255.145 361.912,258.511 377.787,259.082 383.819,254.701 378.041,252.288 355.752,252.796 356.133,255.209
no net on Top Layer "Top Layer-No Net" (hatched 90Degree grid 0.508 track 0.508, remove dead copper, pour order 1000): 331.408,353.679 307.427,309.119 330.097,297.403 332.172,296.653 334.447,295.803 343.747,292.828 349.494,303.09 349.497,317.003 350.689,337.744 350.697,339.428 344.823,346.478 331.394,353.653
no net on Top Layer "TopLayer-No Net" (solid, pour order 20): 431.128,296.917 439.103,299.228 450.33,305.121 451.549,314.341 448.832,319.218 436.055,313.071 435.674,304.969 431.128,296.917
no net on Top Layer "TopLayer" (solid, remove dead copper, pour order 23): 414.68,362.485 390.296,355.119 390.487,337.784 391.947,337.339 395.567,337.339 401.79,335.307 406.87,326.1 414.68,325.719 416.204,319.496 427.253,321.464 427.317,321.528 425.92,327.179 414.871,338.228 413.093,338.292 409.473,339.308 406.679,343.562 406.362,345.467 408.14,351.563 416.204,359.628 414.68,362.422
no net on Top Layer "TopLayer" (solid, remove dead copper, pour order 27): 355.816,336.196 355.879,324.322 365.023,324.449 367.817,326.227 370.23,331.688 370.675,332.767 384.962,332.386 388.074,328.195 397.408,328.195 398.615,329.656 399.313,330.608 399.313,334.418 388.899,334.863 387.439,336.768 355.816,337.339 355.816,335.815
no net on Top Layer "TopLayer" (solid, remove dead copper, pour order 28): 355.943,337.276 361.912,340.641 377.787,341.213 383.819,336.831 378.041,334.418 355.752,334.926 356.133,337.339
no net on Bottom Layer "Top Layer-No Net" (hatched 90Degree grid 0.508 track 0.508, remove dead copper, pour order 1001): 307.824,226.761 331.896,271.328 345.275,264.061 353.024,255.236 351.499,257.115 350.799,248.086 348.524,221.311 343.574,210.261 307.824,226.511
no net on Bottom Layer "TopLayer-No Net" (solid, pour order 25): 418.871,252.059 427.304,243.652 428.747,238.661 416.532,236.192 413.791,247.106 418.871,252.059
no net on Bottom Layer "TopLayer-No Net" (solid, pour order 24): 431.128,214.787 439.103,217.098 450.33,222.991 451.549,232.211 448.832,237.088 436.055,230.941 435.674,222.839 431.128,214.787
no net on Bottom Layer "TopLayer" (solid, remove dead copper, pour order 21): 414.172,281.879 416.204,277.497 408.203,269.496 406.679,265.496 406.362,263.21 406.679,261.432 407.505,259.844 409.664,257.177 413.093,256.161 414.871,256.098 425.919,245.033 427.312,239.417 416.236,237.369 414.68,243.588 406.87,243.969 401.79,253.177 395.567,255.209 392.011,255.209 390.487,255.653 390.296,274.703 414.172,281.879
no net on Bottom Layer "TopLayer" (solid, remove dead copper, pour order 29): 355.816,255.018 361.912,258.511 377.787,259.019 383.819,254.701 387.439,254.637 388.899,252.732 399.313,252.288 399.313,248.414 397.408,246.065 388.074,246.065 384.962,250.256 370.675,250.637 367.817,244.096 364.96,242.255 355.816,242.255 355.816,255.209 361.912,258.511
no net on Bottom Layer "TopLayer" (hatched 90Degree grid 0 track 0.025, remove dead copper, pour order 31): 331.049,269.814 326.504,261.368 326.538,261.432
no net on Bottom Layer "Top Layer-No Net" (hatched 90Degree grid 0.508 track 0.508, remove dead copper, pour order 1001): 307.824,308.891 331.896,353.458 345.275,346.191 353.024,337.366 351.499,339.245 350.799,330.216 348.524,303.441 343.574,292.391 307.824,308.641
no net on Bottom Layer "TopLayer-No Net" (solid, pour order 25): 418.871,334.189 427.304,325.782 428.747,320.791 416.532,318.322 413.791,329.236 418.871,334.189
no net on Bottom Layer "TopLayer-No Net" (solid, pour order 24): 431.128,296.917 439.103,299.228 450.33,305.121 451.549,314.341 448.832,319.218 436.055,313.071 435.674,304.969 431.128,296.917
no net on Bottom Layer "TopLayer" (solid, remove dead copper, pour order 21): 414.172,364.009 416.204,359.628 408.203,351.627 406.679,347.626 406.362,345.34 406.679,343.562 407.505,341.975 409.664,339.308 413.093,338.292 414.871,338.228 425.919,327.163 427.312,321.547 416.236,319.499 414.68,325.719 406.87,326.1 401.79,335.307 395.567,337.339 392.011,337.339 390.487,337.784 390.296,356.834 414.172,364.009
no net on Bottom Layer "TopLayer" (solid, remove dead copper, pour order 29): 355.816,337.149 361.912,340.641 377.787,341.149 383.819,336.831 387.439,336.768 388.899,334.863 399.313,334.418 399.313,330.545 397.408,328.195 388.074,328.195 384.962,332.386 370.675,332.767 367.817,326.227 364.96,324.385 355.816,324.385 355.816,337.339 361.912,340.641
no net on Bottom Layer "TopLayer" (hatched 90Degree grid 0 track 0.025, remove dead copper, pour order 31): 331.049,351.944 326.504,343.499 326.538,343.562

## Keep-outs
Top Layer:
  circle w0.127: c337.939,312.063 r3.5
  circle w0.127: c337.939,229.933 r3.5
Bottom Layer:
  circle w0.127: c337.939,312.038 r3.5
  circle w0.127: c337.939,229.908 r3.5
Keep-Out Layer:
  circle w0.254: c327.609,264.318 r0.3
  circle w0.254: c327.291,263.683 r0.3
  circle w0.254: c326.593,262.349 r0.3
  circle w0.254: c326.974,263.048 r0.3
  circle w0.254: c326.974,345.178 r0.3
  circle w0.254: c326.593,344.479 r0.3
  circle w0.254: c327.291,345.813 r0.3
  circle w0.254: c327.609,346.448 r0.3
  circle w0.254: c437.134,264.204 r0.3
  circle w0.254: c437.452,263.632 r0.3
  circle w0.254: c437.769,262.997 r0.3
  circle w0.254: c438.087,262.489 r0.3
  circle w0.254: c438.404,261.918 r0.3
  circle w0.254: c438.404,344.048 r0.3
  circle w0.254: c438.087,344.619 r0.3
  circle w0.254: c437.769,345.127 r0.3
  circle w0.254: c437.452,345.762 r0.3
  circle w0.254: c437.134,346.334 r0.3
  circle w0.254: c413.992,290.135 r0.3
  circle w0.254: c413.421,290.008 r0.3
  circle w0.254: c412.786,289.881 r0.3
  circle w0.254: c412.087,289.754 r0.3
  circle w0.254: c411.452,289.564 r0.3
  circle w0.254: c411.478,279.7 r0.3
  circle w0.254: c412.113,280.03 r0.3
  circle w0.254: c412.672,280.258 r0.3
  circle w0.254: c413.357,280.563 r0.3
  circle w0.254: c413.916,280.843 r0.3
  circle w0.254: c353.604,289.754 r0.3
  circle w0.254: c353.032,289.881 r0.3
  circle w0.254: c352.397,290.072 r0.3
  circle w0.254: c351.762,290.199 r0.3
  circle w0.254: c351.064,290.326 r0.3
  circle w0.254: c351.737,280.182 r0.3
  circle w0.254: c352.321,279.903 r0.3
  circle w0.254: c352.931,279.598 r0.3
  circle w0.254: c353.591,279.268 r0.3
  circle w0.254: c351.127,280.487 r0.3
  circle w0.254: c446.316,330.019 r0.3
  circle w0.254: c446.634,329.448 r0.3
  circle w0.254: c446.951,328.813 r0.3
  circle w0.254: c447.269,328.305 r0.3
  circle w0.254: c447.586,327.733 r0.3
  circle w0.254: c449.345,242.508 r0.3
  circle w0.254: c449.663,241.936 r0.3
  circle w0.254: c449.98,241.301 r0.3
  circle w0.254: c450.298,240.793 r0.3
  circle w0.254: c450.615,240.222 r0.3
  circle w0.254: c315.417,323.842 r0.3
  circle w0.254: c315.099,323.207 r0.3
  circle w0.254: c314.401,321.873 r0.3
  circle w0.254: c314.782,322.572 r0.3
  circle w0.254: c319.481,249.293 r0.3
  circle w0.254: c319.163,248.658 r0.3
  circle w0.254: c318.465,247.324 r0.3
  circle w0.254: c318.846,248.023 r0.3
  circle w0.1: c461.252,365.309 r0.967
  circle w0.1: c304.839,362.388 r0.916
  circle w0.1: c304.728,213.29 r0.773
  circle w0.127: c337.939,312.088 r2.3
  circle w0.127: c352.306,345.596 r4
  circle w0.127: c413.94,345.672 r2.3
  circle w0.127: c352.329,345.672 r2.3
  circle w0.127: c337.939,229.958 r2.3
  circle w0.127: c352.306,263.466 r4
  circle w0.127: c413.94,263.542 r2.3
  circle w0.127: c352.329,263.542 r2.3
  circle w0.1: c460.998,210.623 r0.967
  lines w0.254: 307.843,226.694 340.143,286.712 ; 307.843,308.824 340.143,368.842 ; 316.086,324.559 ccw(c315.798,324.477) 316.098,324.477 ; 320.15,250.01 ccw(c319.862,249.928) 320.162,249.928 ; 328.278,265.035 ccw(c327.99,264.953) 328.29,264.953 ; 328.278,347.165 ccw(c327.99,347.083) 328.29,347.083 ; 340.122,286.682 ccw(c382.165,343.896) 424.153,286.642 ; 340.122,368.812 ccw(c382.165,426.026) 424.153,368.772 ; 380.788,204.812 cw(c380.788,204.477) 381.025,204.714 ; 380.788,286.942 cw(c380.788,286.607) 381.025,286.844 ; 424.102,286.712 457.949,226.574 ; 424.102,368.842 457.949,308.704 ; 457.949,368.724 457.949,226.574 ; 457.962,204.781 457.949,204.794 457.949,226.574 ; 307.787,204.781 307.787,368.772 ; 307.787,204.781 463.997,204.781 463.997,368.772 457.901,368.772 424.153,368.772 ; 307.787,204.781 301.818,204.781 301.818,368.772 307.787,368.772 ; 307.787,368.772 424.153,368.772 ; 457.949,226.574 cw(c383.009,344.829) 307.787,226.754 ccw(c383.009,344.829) 457.949,226.574 ; 457.949,308.704 cw(c383.009,426.959) 307.787,308.884 ccw(c383.009,426.959) 457.949,308.704
  lines w1: 356.564,271.996 362.088,270.028 ; 356.564,354.127 362.088,352.158 ; 399.821,240.985 401.472,238.889 403.314,238.889 ; 399.821,323.115 401.472,321.02 403.314,321.02 ; 402.916,233.792 427.527,238.131 ; 402.916,315.922 427.527,320.261 ; 403.67,208.437 403.67,213.703 405.071,215.104 434.023,223.423 433.09,230.721 430.767,232.348 425.247,231.374 407.221,228.196 ; 403.67,290.567 403.67,295.833 405.071,297.234 434.023,305.553 433.09,312.851 430.767,314.478 425.247,313.504 407.221,310.326 ; 424.192,237.543 429.116,238.411 439.949,240.322 ; 424.192,319.673 429.116,320.541 439.949,322.452 ; 424.205,250.383 426.872,246.217 428.827,238.34 ; 424.205,332.513 426.872,328.347 428.827,320.47
  lines w1.2: 351.438,232.028 351.438,238.803 354.813,242.178 354.813,257.083 ; 351.438,314.158 351.438,320.933 354.813,324.308 354.813,339.213 ; 354.029,241.394 363.722,241.394 ; 354.029,323.524 363.722,323.524 ; 381.254,231.941 383.54,229.655 387.35,229.655 ; 381.254,314.071 383.54,311.785 387.35,311.785

## Other copper
Top Layer:
  rectangle: 388.395,246.053 392.288,246.838
  rectangle: 388.395,328.183 392.288,328.968
  pour cut-out: 346.813,237.628 346.813,236.203 344.863,234.403 340.963,234.403 340.963,236.856
  pour cut-out: 346.813,319.758 346.813,318.333 344.863,316.533 340.963,316.533 340.963,318.986

## Silkscreen, mask and mechanical layers (free items; w line width, h text height)
Top Overlay:
  text "地线" at 417.713,351.658 h1.5
  text "电源指示灯" at 335.813,349.433 h1.5 r61
  text "火线" at 364.788,336.708 h1.5
  text "电机线" at 360.913,336.608 h1.5
  text "输出指示灯" at 346.588,334.733 h1.5 r61
  text "零线" at 439.488,333.058 h1.5 r24
  text "电机线" at 435.863,331.508 h1.5 r24
  text "信号线" at 323.938,330.883 h1.5 r61
  text "信号线" at 342.813,327.358 h1.5 r61
  text "火线" at 401.788,306.683 h1.5
  text "零线" at 425.138,297.383 h1.5
  text "地线" at 417.713,269.528 h1.5
  text "电源指示灯" at 335.813,267.303 h1.5 r61
  text "火线" at 364.788,254.578 h1.5
  text "电机线" at 360.913,254.478 h1.5
  text "输出指示灯" at 346.588,252.603 h1.5 r61
  text "零线" at 439.488,250.928 h1.5 r24
  text "电机线" at 435.863,249.378 h1.5 r24
  text "信号线" at 323.938,248.753 h1.5 r61
  text "信号线" at 342.813,245.228 h1.5 r61
  text "火线" at 401.788,224.553 h1.5
  text "零线" at 425.138,215.253 h1.5
Bottom Overlay:
  text "10515.0502_CVSP1 2020_V1.1" at 396.688,309.183 h3
  text "20201019H1.6Sn" at 387.188,305.833 h3
  text "10515.0502_CVSP1 2020_V1.1" at 396.688,227.053 h3
  text "20201019H1.6Sn" at 387.188,223.703 h3
Bottom Solder:
  lines w0.254: 330.315,256.82 331.94,255.653 ; 330.315,338.95 331.94,337.784
  lines w0.3: 328.32,253.361 330.626,252.395 ; 328.32,335.491 330.626,334.525
  lines w3: 408.983,225.114 426.78,228.252 430.346,225.755 409.944,219.968 406.494,224.675 ; 408.983,307.244 426.78,310.382 430.346,307.885 409.944,302.098 406.494,306.805 ; 417.58,213.287 417.68,213.467 ; 417.58,295.417 417.68,295.597 ; 423.025,227.538 406.494,224.675 ; 423.025,309.668 406.494,306.805 ; 427.064,225.709 411.544,222.712 406.494,224.675 ; 427.064,307.839 411.544,304.842 406.494,306.805
  lines w5: 409.512,211.485 432.88,218.368 437.122,219.943 ; 409.512,293.615 432.88,300.498 437.122,302.073 ; 437.732,220.248 439.103,222.483 438.804,228.833 ; 437.732,302.378 439.103,304.613 438.804,310.963